# Altium PCB SI1125HD_replacement.PcbDoc
Units mm, origin at the board's own origin, x right, y up, seen from the top; angles counter-clockwise.
Board outline 53 x 28.96 mm, 2 copper layers (Top Layer, Bottom Layer); 8 components, 12 nets, 48 pads, 4 vias.
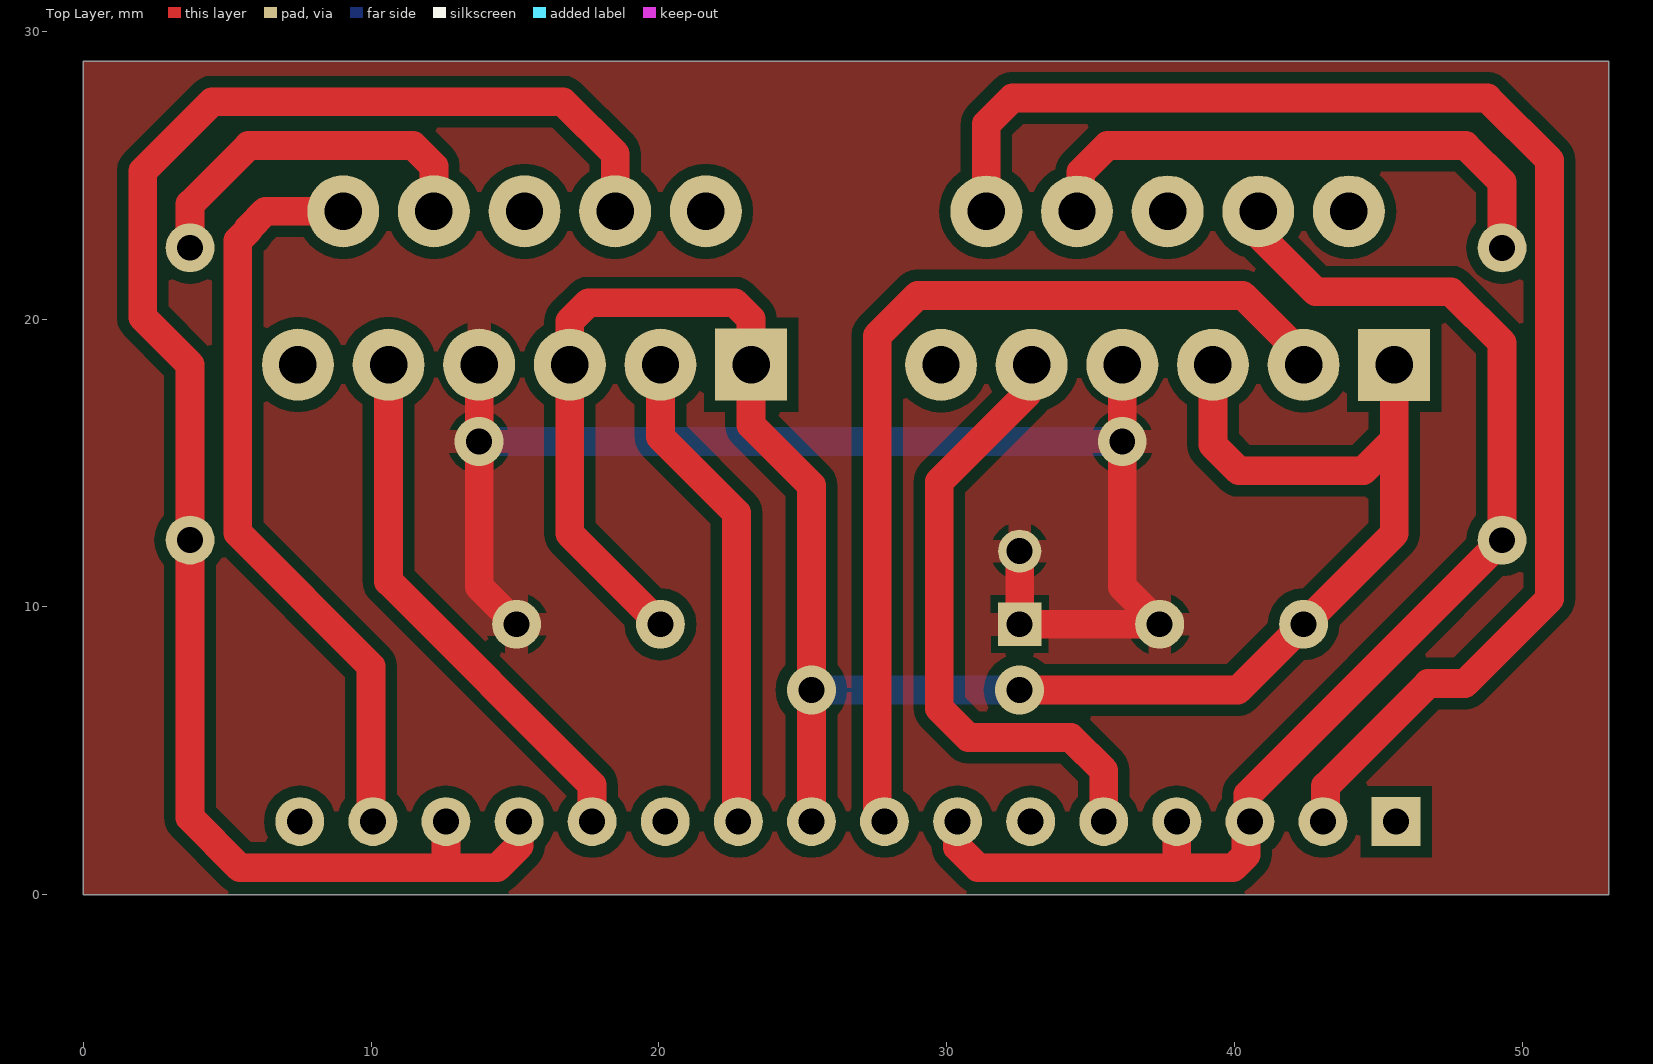
[diagram p0: Top Layer view]
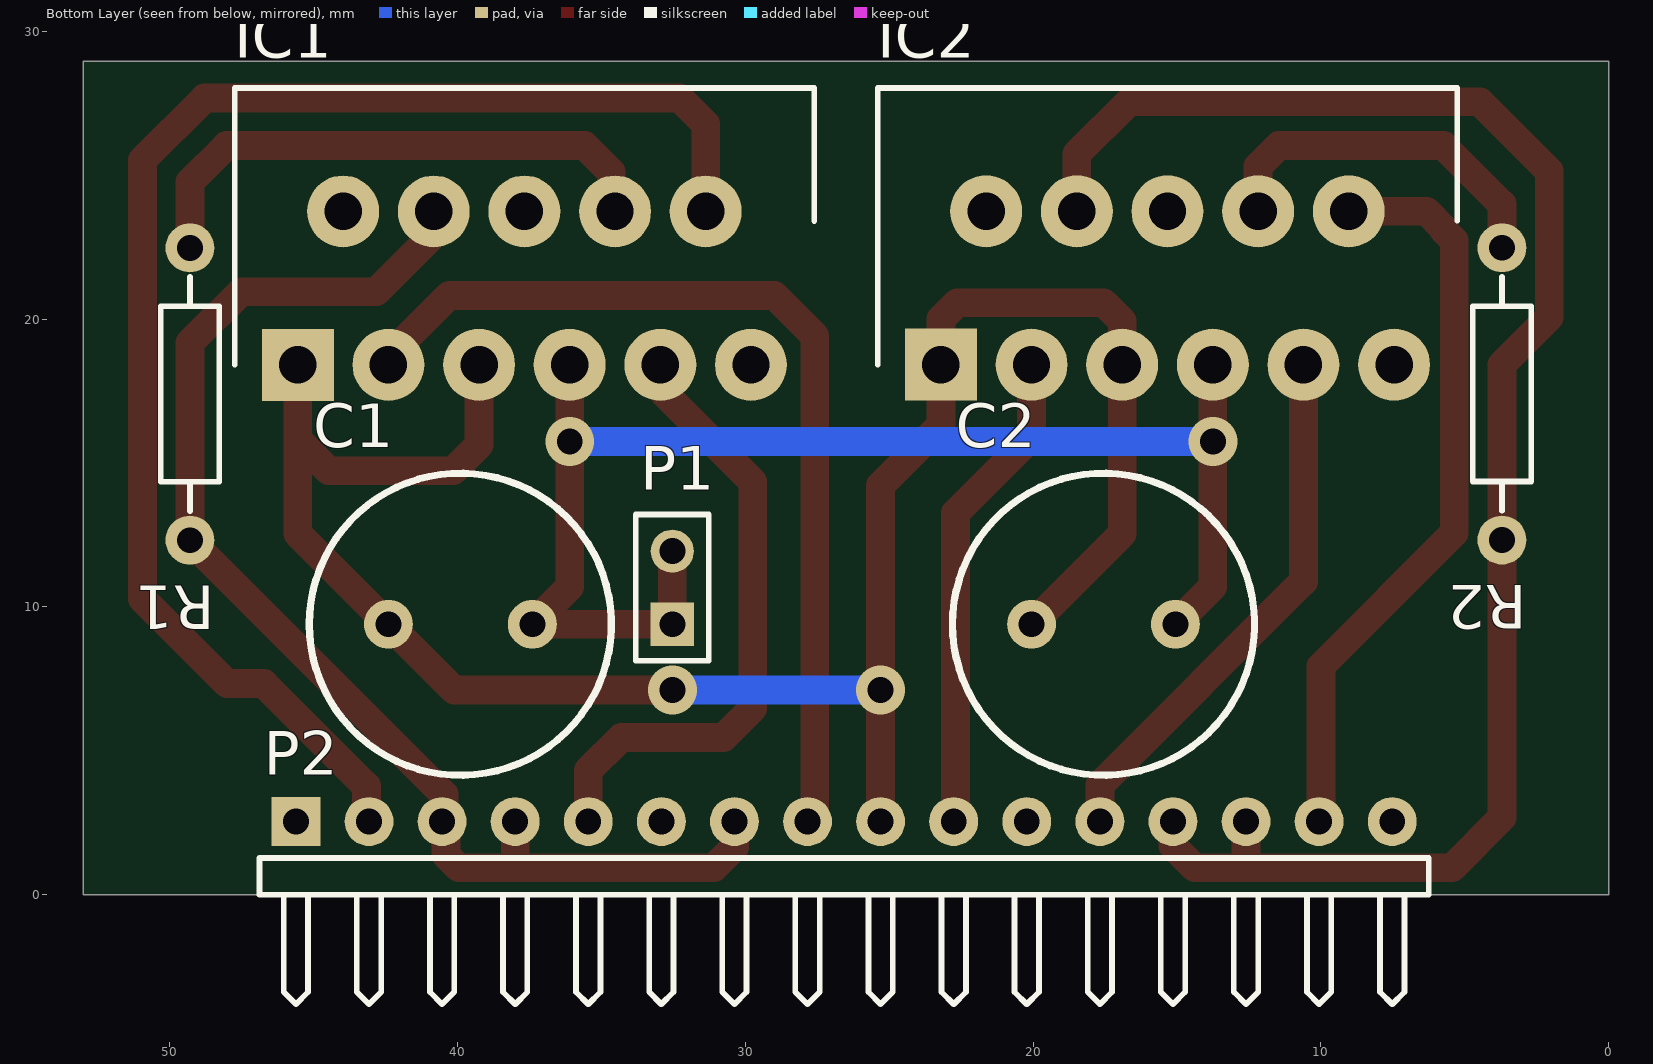
[diagram p1: Bottom Layer view, seen from below]

## Layer stack, top to bottom
Top Solder: solder mask 0.0102, Solder Resist, Dk 3.5
Top Layer: signal copper 0.0356
Dielectric 1: dielectric 0.32, FR-4, Dk 4.8
Bottom Layer: signal copper 0.0356
Bottom Solder: solder mask 0.0102, Solder Resist, Dk 3.5

## Board outline
0,0 53,0 53,28.956 0,28.956

## Design rules (kind name [scope] priority, off if disabled: settings)
Clearance Clearance_1 [(InNamedPolygon('Top Layer-GND'))] p1: gap=0.4 ignorepadtopadclearanceinfootprint=FALSE
Clearance Clearance_plane [All] p2: gap=0.254 ignorepadtopadclearanceinfootprint=FALSE
PolygonConnect [All] p1: connectstyle=Relief reliefconductorwidth=0.8 reliefentries=4 polygonreliefangle="90 Angle" airgapwidth=0.254
RoutingVias [All] p1: holewidth=0.9 width=1.7 viastyle="Through Hole" minholewidth=0.711 minwidth=1.27 maxholewidth=3 maxwidth=3
SolderMaskExpansion [All] p1: expansion=0.102
Width [All] p1: maxlimit=2 minlimit=0.254 preferedwidth=1
30 further rules are at their usual default settings.

## Components (designator, comment, footprint, x,y, rotation, side; value= is the part's Value field where it differs from the comment)
C1 "Cap Pol1" RB5-10.5 39.902,9.398 r180 bottom value=100pF
C2 "Cap Pol1" RB5-10.5 17.552,9.398 r180 bottom value=100pF
IC1 "LM3886TF" TO158P462X2002X2328-11P 45.552,18.415 r180 bottom
IC2 "LM3886TF" TO158P462X2002X2328-11P 23.202,18.419 r180 bottom
P1 "Header 2" HDR1X2 32.536,9.398 r90 bottom
P2 "Header 16H" HDR1X16H 45.617,2.54 r180 bottom
R1 "Res2" AXIAL-0.4 49.3,17.399 r270 bottom value=1K
R2 "Res2" AXIAL-0.4 3.704,17.403 r270 bottom value=1K

## Footprints (in the part's own frame and the unit in brackets; to place one, negate y for a bottom-side part, rotate by r counter-clockwise, add the part's x,y. Pads: shape width x height; smd on the part's side, far side on the other; paste and mask are expansions set on the pad)
AXIAL-0.4 [mm] "Axial Device, Thru-Hole; 2 Leads; 0.4 in Pin Spacing"
  round 1.7 hole 0.9: 1(-5.08,0) 2(5.08,0)
  silkscreen extent -4.06,-1.02 4.06,1.02
HDR1X2 [mm] "Connector; Header; 2 Position"
  rect 1.5x1.5 hole 0.9: 1(0,0)
  round 1.5 hole 0.9: 2(2.54,0)
  silkscreen extent -1.27,-1.27 3.81,1.27
HDR1X16H [mm] "Connector; Header; 16 Position; Right Angle"
  rect 1.7x1.7 hole 0.9: 1(0,0)
  round 1.7 hole 0.9: 2(2.54,0) 3(5.08,0) 4(7.62,0) 5(10.16,0) 6(12.7,0) 7(15.24,0) 8(17.78,0) 9(20.32,0) 10(22.86,0) 11(25.4,0) 12(27.94,0) 13(30.48,0) 14(33.02,0) 15(35.56,0) 16(38.1,0)
  silkscreen extent -1.27,-6.35 39.37,-1.27
RB5-10.5 [mm] "Capacitor (Radial); 2 Leads"
  round 1.7 hole 0.9: 1(-2.5,0) 2(2.5,0)
  silkscreen extent -5.25,-5.25 5.25,5.25
TO158P462X2002X2328-11P [mm]
  rect 2.5x2.5 hole 1.3: 1(0,0)
  round 2.5 hole 1.3: 2(1.575,5.33) 3(3.15,0) 4(4.725,5.33) 5(6.3,0) 6(7.875,5.33) 7(9.45,0) 8(11.025,5.33) 9(12.6,0) 10(14.175,5.33) 11(15.75,0)
  silkscreen extent -2.19,0 17.95,9.62, body extent -2.14,-0.2 17.88,9.62, height 22.72

## Part data
C1 C2: "Polarized Capacitor (Radial)", LatestRevisionDate=17-Jul-2002, LatestRevisionNote="Re-released for DXP Platform.", PackageDescription="Polarized Capacitor (Radial); 2 Leads", PackageReference=RB7.6-15, Published=8-Jun-2000, Publisher="Altium Limited"
IC1 IC2: "Integrated Circuit", Manufacturer_Name="Texas Instruments", Mouser Part Number=926-LM3886TF, Arrow Part Number=LM3886TF, Arrow Price/Stock=https://www.arrow.com/en/products/lm3886tf/texas-instruments, Datasheet Link=http://www.ti.com/general/docs/lit/getliterature.tsp?genericPartNumber=LM3886&fileType=pdf, Height=4.62mm, Manufacturer_Part_Number=LM3886TF, Mouser Price/Stock=https://www.mouser.co.uk/ProductDetail/Texas-Instruments/LM3886TF?qs=QbsRYf82W3EGenm0NUw7Ug%3D%3D
P1: "Header, 2-Pin", LatestRevisionDate=17-Jul-2002, LatestRevisionNote="Re-released for DXP Platform.", Publisher="Altium Limited"
P2: "Header, 16-Pin, Right Angle", LatestRevisionDate=17-Jul-2002, LatestRevisionNote="Re-released for DXP Platform.", Publisher="Altium Limited"
R1 R2: "Resistor", LatestRevisionDate=17-Jul-2002, LatestRevisionNote="Re-released for DXP Platform.", PackageDescription="Axial Device, Thru-Hole; 2 Leads; 0.4 in Pin Spacing", PackageReference=AXIAL-0.4, Published=8-Jun-2000, Publisher="Altium Limited"

## Via types
v1: diameter 1.7, hole 0.9, Top Layer to Bottom Layer, tented top, 4 vias

## Nets (pads, with @x,y where several pads share a name; then routed paths per layer and width w, separated by ;. In a path a pad name is that pad's centre, name@x,y a point inside that pad or via, vN(x,y) a via of type N, cw(c..) or ccw(c..) an arc to the next point about the centre after c; other vN are vias at no path point)
GND: C1.2 C2.2 IC1.7 IC2.7 P1.1 P1.2 | length 48.9
  Top Layer w1: IC2.7 13.752,10.698 C2.2 ; P1.2 P1.1 C1.2 36.102,10.698 v1(36.102,15.748) IC1.7
  Bottom Layer w1: v1(13.74,15.748) v1(36.102,15.748)
NetIC1_8: IC1.8 R1.1 | length 19.3
  Top Layer w1: IC1.8 34.661,23.879 34.661,25.112 35.584,26.035 48.03,26.035 49.3,24.765 R1.1
NetIC2_8: IC2.8 R2.1 | length 12.7
  Top Layer w1: R2.1 3.704,24 5.739,26.035 11.454,26.035 12.177,25.312 IC2.8
OUT1: IC1.3 P2.8 | length 33.6
  Top Layer w1: P2.8 27.583,2.794 27.583,19.418 28.993,20.828 40.283,20.828 42.402,18.709 IC1.3
OUT2: IC2.3 P2.10 | length 17
  Top Layer w1: IC2.3 20.052,15.913 22.692,13.273 22.692,2.605 P2.10
V1-: IC1.4 P2.3 P2.4 P2.7 R1.2 | length 45.6
  Top Layer w1: P2.7 30.377,1.651 31.092,0.936 37.997,0.936 ; P2.4@37.863,2.406 P2.4 37.997,0.936 ; IC1.4 40.827,22.951 42.823,20.955 47.522,20.955 49.3,19.177 R1.2 40.472,3.491 40.472,2.605 P2.3 40.403,2.406 40.403,1.388 39.951,0.936 37.997,0.936
V2-: IC2.4 P2.13 P2.14 R2.2 | length 58.3
  Top Layer w1: P2.14 12.597,1.063 12.47,0.936 ; P2.13 15.137,2.351 15.137,1.698 14.375,0.936 12.47,0.936 ; IC2.4 18.477,25.743 16.661,27.559 4.469,27.559 2.056,25.146 2.056,20.066 3.704,18.418 R2.2 3.704,2.67 5.438,0.936 12.47,0.936
V+: C1.1 C2.1 IC1.1 IC1.5 IC2.1 IC2.5 P2.9 | length 75.2
  Top Layer w1: C2.1 16.902,12.548 IC2.5 16.902,19.926 17.55,20.574 22.63,20.574 23.202,20.002 IC2.1 23.202,16.319 25.297,14.224 v1(25.297,7.112) P2.9 ; v1(32.536,7.112) 40.116,7.112 C1.1 45.552,12.548 45.552,15.81 ; IC1.5 39.252,15.636 40.156,14.732 44.474,14.732 45.552,15.81 ; IC1.1 45.552,15.81
  Bottom Layer w1: v1(25.297,7.112) v1(32.536,7.112)
VIN1+: IC1.10 P2.2 | length 50.9
  Top Layer w1: IC1.10 31.377,26.781 32.282,27.686 48.792,27.686 50.951,25.527 50.951,10.287 48.001,7.337 46.731,7.337 43.167,3.773 43.167,2.63 P2.2
VIN1-: IC1.9 P2.5 | length 21.7
  Top Layer w1: IC1.9 32.77,18.233 32.77,17.379 29.742,14.351 29.742,6.477 30.758,5.461 34.314,5.461 35.457,4.318 P2.5
VIN2+: IC2.10 P2.15 | length 26.3
  Top Layer w1: IC2.10 6.325,23.749 5.739,23.163 5.739,23.114 5.358,22.733 5.358,12.573 9.992,7.939 9.992,2.605 P2.15
VIN2-: IC2.9 P2.12 | length 18.8
  Top Layer w1: IC2.9 10.602,10.885 17.677,3.81 P2.12
pads on no net: IC1.2 IC1.6 IC1.11 IC2.2 IC2.6 IC2.11 P2.1 P2.6 P2.11 P2.16

## Polygon pours and split planes (outlines as drawn)
GND on Top Layer "Top Layer-GND" (solid, pour order 0): 0,28.956 53,28.956 53,0 0,0

## Silkscreen, mask and mechanical layers (free items; w line width, h text height)
Mechanical 1:
  the board outline again, w0.254